# Altium PCB UZ_D_Temperature_Card_LTC2983.PcbDoc (part 2 of 2)
Units mm, origin at the board's own origin, x right, y up, seen from the top; angles counter-clockwise.
Board outline 155.99 x 100 mm, 4 copper layers (Top Layer, Layer 1, Layer 2, Bottom Layer), stack 0.98 mm thick; 288 components, 267 nets, 958 pads, 313 vias.
Unrouted connection lines stored in the file: 35.
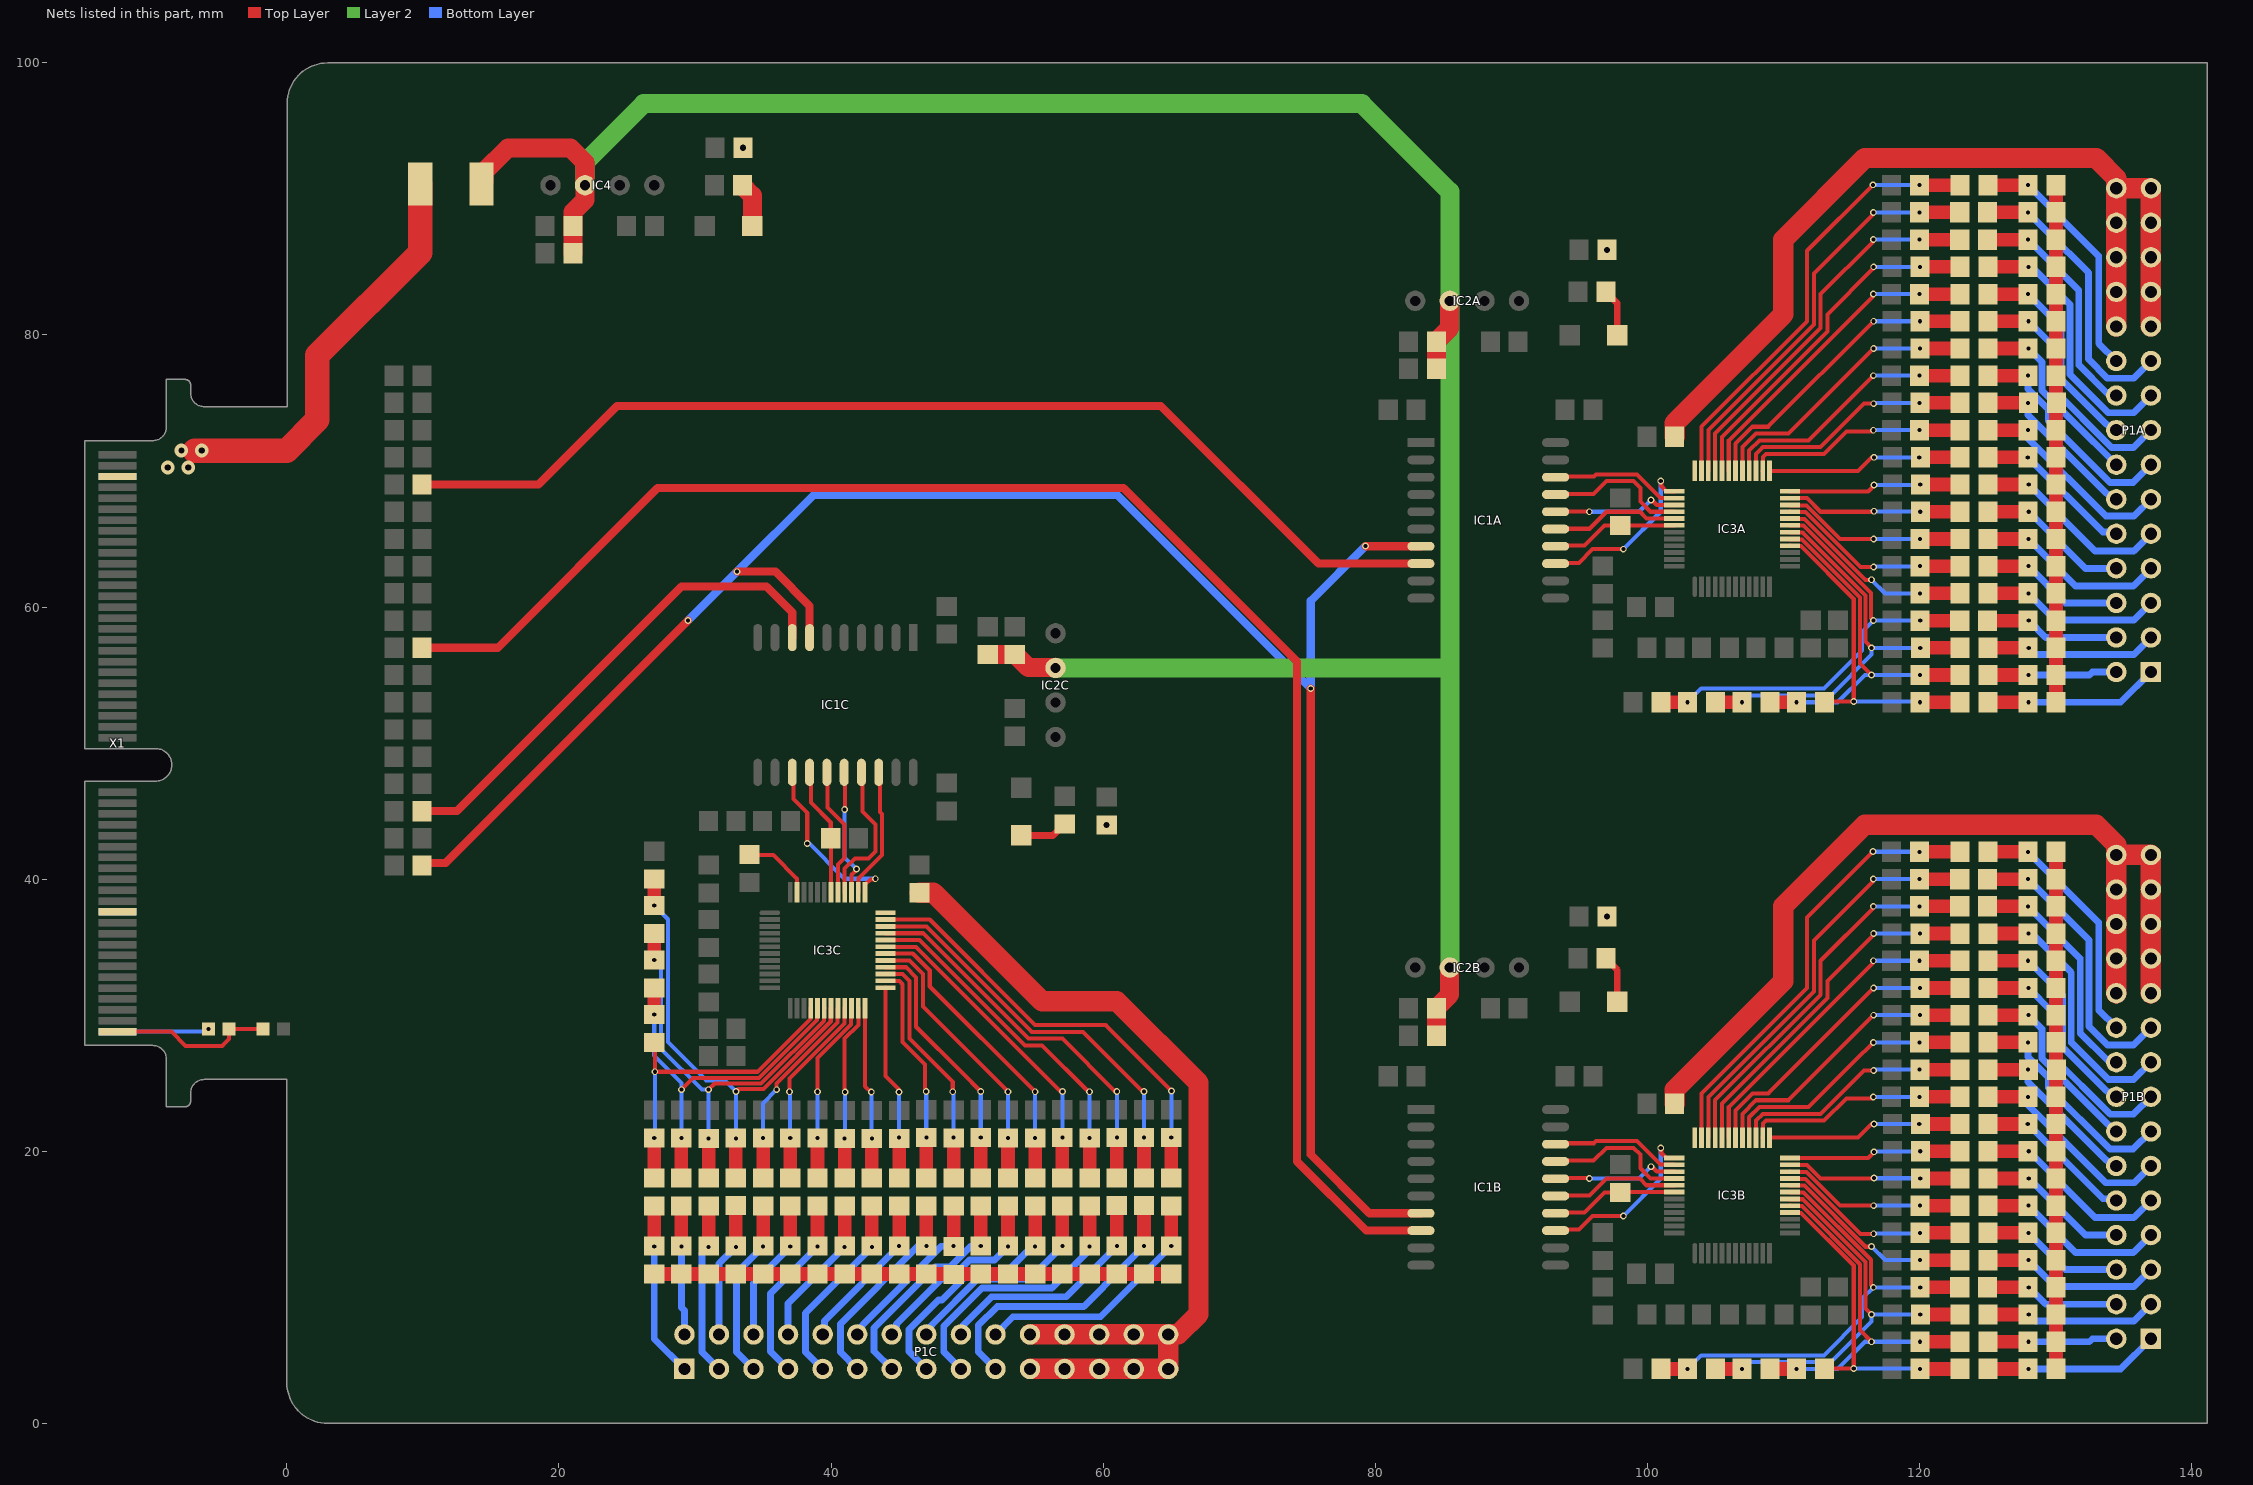
[diagram p4: the nets of this part, all layers, seen from the top]

## Via types
v1: diameter 0.5, hole 0.3, Top Layer to Bottom Layer, 229 vias
v2: diameter 1, hole 0.45, Top Layer to Bottom Layer, 84 vias

## Nets (pads, with @x,y where several pads share a name; then routed paths per layer and width w, separated by ;. In a path a pad name is that pad's centre, name@x,y a point inside that pad or via, vN(x,y) a via of type N, cw(c..) or ccw(c..) an arc to the next point about the centre after c; other vN are vias at no path point) (continued)
NetC10C_2: C10C.2 IC3C.47 | length 5.2
  Top Layer w0.3: C10C.2@34,41.8 34.025,41.775 35.75,41.775 37.5,40.025 IC3C.47@37.5,39.025
NetC14A_1: C14A.1 IC3A.16 R4A.1 R44A.1 | length 23.9
  Top Layer w0.3: IC3A.16@110.475,64.5 110.5,64.475 111.279,64.475 115.16,60.594 v1(115.16,53.044) 113.044,53.044 R44A.1@113,53
  Top Layer w1: v1(120.025,53) R4A.1@122.975,53
  Bottom Layer w0.3: v1(115.16,53.044) 119.981,53.044 v1(120.025,53)
NetC14B_1: C14B.1 IC3B.16 R4B.1 R44B.1 | length 23.9
  Top Layer w0.3: IC3B.16@110.475,15.5 110.5,15.475 111.279,15.475 115.16,11.594 v1(115.16,4.044) 113.044,4.044 R44B.1@113,4
  Top Layer w1: v1(120.025,4) R4B.1@122.975,4
  Bottom Layer w0.3: v1(115.16,4.044) 119.981,4.044 v1(120.025,4)
NetC14C_1: C14C.1 IC3C.16 R4C.1 R44C.1 | length 23.9
  Top Layer w0.3: R44C.1@27,28 27.044,27.956 v1(27.044,25.84) 34.594,25.84 38.475,29.721 38.475,30.5 IC3C.16@38.5,30.525
  Top Layer w1: R4C.1@27,18.025 v1(27,20.975)
  Bottom Layer w0.3: v1(27,20.975) 27.044,21.019 v1(27.044,25.84)
NetC15A_2: C15A.2 IC3A.35 R23A.1 | length 32.7
  Top Layer w0.3: IC3A.35@103.975,70 103.975,73.25 111.725,81 111.725,86.184 v1(116.568,91.026)
  Top Layer w1: v1(120,91) R23A.1@122.975,91
  Bottom Layer w0.3: v1(116.568,91.026) 116.581,91.013 119.987,91.013 v1(120,91)
NetC15B_2: C15B.2 IC3B.35 R23B.1 | length 32.7
  Top Layer w0.3: IC3B.35@103.975,21 103.975,24.25 111.725,32 111.725,37.184 v1(116.568,42.026)
  Top Layer w1: v1(120,42) R23B.1@122.975,42
  Bottom Layer w0.3: v1(116.568,42.026) 116.581,42.013 119.987,42.013 v1(120,42)
NetC15C_2: C15C.2 IC3C.35 R23C.1 | length 32.7
  Top Layer w0.3: IC3C.35@44,37.025 47.25,37.025 55,29.275 60.184,29.275 v1(65.026,24.432)
  Top Layer w1: R23C.1@65,18.025 v1(65,21)
  Bottom Layer w0.3: v1(65,21) 65.013,21.013 65.013,24.419 v1(65.026,24.432)
NetC16A_1: C16A.1 IC3A.17 R5A.1 R44A.2 R47A.1 | length 27.9
  Top Layer w0.3: IC3A.17@110.475,65 110.5,64.975 111.344,64.975 115.625,60.694 115.625,55.85 v1(116.475,55) ; v1(110.95,53) R44A.2@110.95,53.05
  Top Layer w1: R47A.1@109,53 v1(110.95,53) ; v1(120.025,55) R5A.1@123,55
  Bottom Layer w0.3: v1(110.95,53) 113.975,53 115.975,55 v1(120.025,55)
NetC16B_1: C16B.1 IC3B.17 R5B.1 R44B.2 R47B.1 | length 27.9
  Top Layer w0.3: IC3B.17@110.475,16 110.5,15.975 111.344,15.975 115.625,11.694 115.625,6.85 v1(116.475,6) ; v1(110.95,4) R44B.2@110.95,4.05
  Top Layer w1: R47B.1@109,4 v1(110.95,4) ; v1(120.025,6) R5B.1@123,6
  Bottom Layer w0.3: v1(110.95,4) 113.975,4 115.975,6 v1(120.025,6)
NetC16C_1: C16C.1 IC3C.17 R5C.1 R44C.2 R47C.1 | length 27.9
  Top Layer w0.3: v1(27,30.05) R44C.2@27.05,30.05 ; v1(29,24.525) 29.85,25.375 34.694,25.375 38.975,29.656 38.975,30.5 IC3C.17@39,30.525
  Top Layer w1: v1(27,30.05) R47C.1@27,32 ; R5C.1@29,18 v1(29,20.975)
  Bottom Layer w0.3: v1(27,30.05) 27,27.025 29,25.025 v1(29,20.975)
NetC17A_2: C17A.2 IC3A.34 R22A.1 | length 30.4
  Top Layer w0.3: IC3A.34@104.475,70 104.475,73 112.225,80.75 112.225,84.5 116.562,88.837 116.562,88.962 v1(116.6,89)
  Top Layer w1: v1(120,89) R22A.1@122.95,89
  Bottom Layer w0.3: v1(116.6,89) v1(120,89)
NetC17B_2: C17B.2 IC3B.34 R22B.1 | length 30.4
  Top Layer w0.3: IC3B.34@104.475,21 104.475,24 112.225,31.75 112.225,35.5 116.562,39.837 116.562,39.962 v1(116.6,40)
  Top Layer w1: v1(120,40) R22B.1@122.95,40
  Bottom Layer w0.3: v1(116.6,40) v1(120,40)
NetC17C_2: C17C.2 IC3C.34 R22C.1 | length 30.4
  Top Layer w0.3: IC3C.34@44,36.525 47,36.525 54.75,28.775 58.5,28.775 62.837,24.438 62.962,24.438 v1(63,24.4)
  Top Layer w1: R22C.1@63,18.05 v1(63,21)
  Bottom Layer w0.3: v1(63,21) v1(63,24.4)
NetC18A_1: C18A.1 IC3A.18 R6A.1 R45A.1 R47A.2 | length 31.5
  Top Layer w0.3: IC3A.18@110.475,65.5 110.5,65.475 111.41,65.475 116.025,60.86 116.025,57.45 v1(116.475,57)
  Top Layer w1: R45A.1@105,53 v1(106.95,53) ; v1(120.05,57) R6A.1@123,57
  Bottom Layer w0.3: v1(106.95,53) 107.45,53.5 111.157,53.5 113.475,53.5 116.475,56.5 v1(116.475,57) v1(120.05,57)
NetC18B_1: C18B.1 IC3B.18 R6B.1 R45B.1 R47B.2 | length 31.5
  Top Layer w0.3: IC3B.18@110.475,16.5 110.5,16.475 111.41,16.475 116.025,11.86 116.025,8.45 v1(116.475,8)
  Top Layer w1: R45B.1@105,4 v1(106.95,4) ; v1(120.05,8) R6B.1@123,8
  Bottom Layer w0.3: v1(106.95,4) 107.45,4.5 111.157,4.5 113.475,4.5 116.475,7.5 v1(116.475,8) v1(120.05,8)
NetC18C_1: C18C.1 IC3C.18 R6C.1 R45C.1 R47C.2 | length 31.5
  Top Layer w0.3: v1(31,24.525) 31.45,24.975 34.86,24.975 39.475,29.59 39.475,30.5 IC3C.18@39.5,30.525
  Top Layer w1: v1(27,34.05) R45C.1@27,36 ; R6C.1@31,18 v1(31,20.95)
  Bottom Layer w0.3: v1(27,34.05) 27.5,33.55 27.5,29.843 27.5,27.525 30.5,24.525 v1(31,24.525) v1(31,20.95)
NetC19A_2: C19A.2 IC3A.33 R21A.1 | length 28.2
  Top Layer w0.3: IC3A.33@104.975,70 104.975,72.75 112.725,80.5 112.725,83 116.562,86.837 116.562,86.962 v1(116.6,87)
  Top Layer w1: C19A.2@120.025,87 R21A.1@123,87
  Bottom Layer w0.3: v1(116.6,87) v1(120,87)
NetC19B_2: C19B.2 IC3B.33 R21B.1 | length 28.2
  Top Layer w0.3: IC3B.33@104.975,21 104.975,23.75 112.725,31.5 112.725,34 116.562,37.837 116.562,37.962 v1(116.6,38)
  Top Layer w1: C19B.2@120.025,38 R21B.1@123,38
  Bottom Layer w0.3: v1(116.6,38) v1(120,38)
NetC19C_2: C19C.2 IC3C.33 R21C.1 | length 28.2
  Top Layer w0.3: IC3C.33@44,36.025 46.75,36.025 54.5,28.275 57,28.275 60.837,24.438 60.962,24.438 v1(61,24.4)
  Top Layer w1: R21C.1@61,18 C19C.2@61,20.975
  Bottom Layer w0.3: v1(61,21) v1(61,24.4)
NetC20A_1: C20A.1 IC3A.19 R7A.1 R45A.2 R46A.1 | length 35.4
  Top Layer w0.3: IC3A.19@110.475,66 110.5,65.975 111.476,65.975 116.425,61.026 116.425,59.176 v1(116.601,59)
  Top Layer w1: R46A.1@101,53 v1(102.95,53) ; v1(120.05,59) R7A.1@123.025,59
  Bottom Layer w0.3: v1(102.95,53) 103.95,54 112.975,54 115.78,56.805 115.78,58.179 v1(116.601,59) v1(120.05,59)
NetC20B_1: C20B.1 IC3B.19 R7B.1 R45B.2 R46B.1 | length 35.4
  Top Layer w0.3: IC3B.19@110.475,17 110.5,16.975 111.476,16.975 116.425,12.026 116.425,10.176 v1(116.601,10)
  Top Layer w1: R46B.1@101,4 v1(102.95,4) ; v1(120.05,10) R7B.1@123.025,10
  Bottom Layer w0.3: v1(102.95,4) 103.95,5 112.975,5 115.78,7.805 115.78,9.179 v1(116.601,10) v1(120.05,10)
NetC20C_1: C20C.1 IC3C.19 R7C.1 R45C.2 R46C.1 | length 35.4
  Top Layer w0.3: v1(33,24.399) 33.176,24.575 35.026,24.575 39.975,29.524 39.975,30.5 IC3C.19@40,30.525
  Top Layer w1: v1(27,38.05) R46C.1@27,40 ; R7C.1@33,17.975 v1(33,20.95)
  Bottom Layer w0.3: v1(27,38.05) 28,37.05 28,28.025 30.805,25.22 32.179,25.22 v1(33,24.399) v1(33,20.95)
NetC21A_2: C21A.2 IC3A.32 R20A.1 | length 26
  Top Layer w0.3: IC3A.32@105.475,70 105.475,72.5 113.225,80.25 113.225,81.5 116.587,84.862 116.587,84.962 v1(116.625,85)
  Top Layer w1: v1(120.025,85) R20A.1@122.975,85
  Bottom Layer w0.3: v1(116.625,85) v1(120.025,85)
NetC21B_2: C21B.2 IC3B.32 R20B.1 | length 26
  Top Layer w0.3: IC3B.32@105.475,21 105.475,23.5 113.225,31.25 113.225,32.5 116.587,35.862 116.587,35.962 v1(116.625,36)
  Top Layer w1: v1(120.025,36) R20B.1@122.975,36
  Bottom Layer w0.3: v1(116.625,36) v1(120.025,36)
NetC21C_2: C21C.2 IC3C.32 R20C.1 | length 26
  Top Layer w0.3: IC3C.32@44,35.525 46.5,35.525 54.25,27.775 55.5,27.775 58.862,24.413 58.962,24.413 v1(59,24.375)
  Top Layer w1: R20C.1@59,18.025 v1(59,20.975)
  Bottom Layer w0.3: v1(59,20.975) v1(59,24.375)
NetC22A_1: C22A.1 IC3A.20 R8A.1 | length 14.9
  Top Layer w0.3: IC3A.20@110.475,66.5 110.5,66.475 111.541,66.475 116.035,61.981 v1@116.494,61.981 ; v1(116.475,62) v1@116.494,61.981 ; v1@116.513,61.962 v1@116.494,61.981
  Top Layer w1: v1(120.025,61) R8A.1@122.975,61
  Bottom Layer w0.3: v1(116.475,62) 117.475,61 v1(120.025,61)
NetC22B_1: C22B.1 IC3B.20 R8B.1 | length 14.9
  Top Layer w0.3: IC3B.20@110.475,17.5 110.5,17.475 111.541,17.475 116.035,12.981 v1@116.494,12.981 ; v1(116.475,13) v1@116.494,12.981 ; v1@116.513,12.962 v1@116.494,12.981
  Top Layer w1: v1(120.025,12) R8B.1@122.975,12
  Bottom Layer w0.3: v1(116.475,13) 117.475,12 v1(120.025,12)
NetC22C_1: C22C.1 IC3C.20 R8C.1 | length 14.9
  Top Layer w0.3: v1@35.962,24.487 v1@35.981,24.506 ; v1(36,24.525) v1@35.981,24.506 ; IC3C.20@40.5,30.525 40.475,30.5 40.475,29.459 35.981,24.965 v1@35.981,24.506
  Top Layer w1: R8C.1@35,18.025 v1(35,20.975)
  Bottom Layer w0.3: v1(35,20.975) 35,23.525 v1(36,24.525)
NetC23A_2: C23A.2 IC3A.31 R19A.1 | length 23.8
  Top Layer w0.3: IC3A.31@105.975,70 105.975,72.25 116.562,82.837 116.562,82.962 v1(116.6,83)
  Top Layer w1: C23A.2@120.025,83 R19A.1@123,83
  Bottom Layer w0.3: v1(116.6,83) v1(120,83)
NetC23B_2: C23B.2 IC3B.31 R19B.1 | length 23.8
  Top Layer w0.3: IC3B.31@105.975,21 105.975,23.25 116.562,33.837 116.562,33.962 v1(116.6,34)
  Top Layer w1: C23B.2@120.025,34 R19B.1@123,34
  Bottom Layer w0.3: v1(116.6,34) v1(120,34)
NetC23C_2: C23C.2 IC3C.31 R19C.1 | length 23.8
  Top Layer w0.3: IC3C.31@44,35.025 46.25,35.025 56.837,24.438 56.962,24.438 v1(57,24.4)
  Top Layer w1: R19C.1@57,18 C23C.2@57,20.975
  Bottom Layer w0.3: v1(57,21) v1(57,24.4)
NetC24A_1: C24A.1 IC3A.21 R9A.1 | length 14.3
  Top Layer w0.3: IC3A.21@110.475,67 110.5,66.975 111.607,66.975 115.653,62.928 116.653,62.928 116.646,62.936 v1(116.625,62.936)
  Top Layer w1: v1(120.025,63) R9A.1@123,63
  Bottom Layer w0.3: v1(116.625,62.936) 116.657,62.968 119.993,62.968 v1(120.025,63)
NetC24B_1: C24B.1 IC3B.21 R9B.1 | length 14.3
  Top Layer w0.3: IC3B.21@110.475,18 110.5,17.975 111.607,17.975 115.653,13.928 116.653,13.928 116.646,13.936 v1(116.625,13.936)
  Top Layer w1: v1(120.025,14) R9B.1@123,14
  Bottom Layer w0.3: v1(116.625,13.936) 116.657,13.968 119.993,13.968 v1(120.025,14)
NetC24C_1: C24C.1 IC3C.21 R9C.1 | length 14.3
  Top Layer w0.3: v1(36.936,24.375) 36.936,24.354 36.928,24.347 36.928,25.347 40.975,29.393 40.975,30.5 IC3C.21@41,30.525
  Top Layer w1: R9C.1@37,18 v1(37,20.975)
  Bottom Layer w0.3: v1(36.936,24.375) 36.968,24.343 36.968,21.007 v1(37,20.975)
NetC25A_2: C25A.2 IC3A.30 R18A.1 | length 22.2
  Top Layer w0.3: IC3A.30@106.475,70 106.475,72 107.725,73.25 108.875,73.25 v1(116.625,81)
  Top Layer w1: v1(120.025,81) R18A.1@122.975,81
  Bottom Layer w0.3: v1(116.625,81) v1(120.025,81)
NetC25B_2: C25B.2 IC3B.30 R18B.1 | length 22.2
  Top Layer w0.3: IC3B.30@106.475,21 106.475,23 107.725,24.25 108.875,24.25 v1(116.625,32)
  Top Layer w1: v1(120.025,32) R18B.1@122.975,32
  Bottom Layer w0.3: v1(116.625,32) v1(120.025,32)
NetC25C_2: C25C.2 IC3C.30 R18C.1 | length 22.2
  Top Layer w0.3: IC3C.30@44,34.525 46,34.525 47.25,33.275 47.25,32.125 v1(55,24.375)
  Top Layer w1: R18C.1@55,18.025 v1(55,20.975)
  Bottom Layer w0.3: v1(55,20.975) v1(55,24.375)
NetC26A_1: C26A.1 IC3A.22 R10A.1 | length 13.6
  Top Layer w0.3: IC3A.22@110.475,67.5 110.5,67.475 111.673,67.475 114.148,65 v1(116.625,65) v1@116.725,65
  Top Layer w1: v1(120.025,65) R10A.1@122.975,65
  Bottom Layer w0.3: v1(116.625,65) v1(120.025,65)
NetC26B_1: C26B.1 IC3B.22 R10B.1 | length 13.6
  Top Layer w0.3: IC3B.22@110.475,18.5 110.5,18.475 111.673,18.475 114.148,16 v1(116.625,16) v1@116.725,16
  Top Layer w1: v1(120.025,16) R10B.1@122.975,16
  Bottom Layer w0.3: v1(116.625,16) v1(120.025,16)
NetC26C_1: C26C.1 IC3C.22 R10C.1 | length 13.6
  Top Layer w0.3: v1@39,24.275 v1(39,24.375) 39,26.852 41.475,29.327 41.475,30.5 IC3C.22@41.5,30.525
  Top Layer w1: R10C.1@39,18.025 v1(39,20.975)
  Bottom Layer w0.3: v1(39,20.975) v1(39,24.375)
NetC27A_2: C27A.2 IC3A.29 R17A.1 | length 20.8
  Top Layer w0.3: IC3A.29@106.975,70 106.975,71.75 107.975,72.75 110.375,72.75 v1(116.625,79)
  Top Layer w1: C27A.2@120,79 R17A.1@122.975,79
  Bottom Layer w0.3: v1(116.625,79) v1(120.025,79)
NetC27B_2: C27B.2 IC3B.29 R17B.1 | length 20.8
  Top Layer w0.3: IC3B.29@106.975,21 106.975,22.75 107.975,23.75 110.375,23.75 v1(116.625,30)
  Top Layer w1: C27B.2@120,30 R17B.1@122.975,30
  Bottom Layer w0.3: v1(116.625,30) v1(120.025,30)
NetC27C_2: C27C.2 IC3C.29 R17C.1 | length 20.8
  Top Layer w0.3: IC3C.29@44,34.025 45.75,34.025 46.75,33.025 46.75,30.625 v1(53,24.375)
  Top Layer w1: R17C.1@53,18.025 C27C.2@53,21
  Bottom Layer w0.3: v1(53,20.975) v1(53,24.375)
NetC28A_1: C28A.1 IC3A.23 R11A.1 | length 13.1
  Top Layer w0.3: IC3A.23@110.475,68 111.725,68 112.725,67 116.725,67 116.689,67.036 v1(116.65,67.036)
  Top Layer w1: C28A.1@120.025,67 R11A.1@123,67
  Bottom Layer w0.3: v1(116.65,67.036) 116.668,67.018 120.032,67.018 v1(120.05,67)
NetC28B_1: C28B.1 IC3B.23 R11B.1 | length 13.1
  Top Layer w0.3: IC3B.23@110.475,19 111.725,19 112.725,18 116.725,18 116.689,18.036 v1(116.65,18.036)
  Top Layer w1: C28B.1@120.025,18 R11B.1@123,18
  Bottom Layer w0.3: v1(116.65,18.036) 116.668,18.018 120.032,18.018 v1(120.05,18)
NetC28C_1: C28C.1 IC3C.23 R11C.1 | length 13.1
  Top Layer w0.3: v1(41.036,24.35) 41.036,24.311 41,24.275 41,28.275 42,29.275 IC3C.23@42,30.525
  Top Layer w1: R11C.1@41,18 C28C.1@41,20.975
  Bottom Layer w0.3: v1(41,20.95) 41.018,20.968 41.018,24.332 v1(41.036,24.35)
NetC29A_2: C29A.2 IC3A.28 R16A.1 | length 19.3
  Top Layer w0.3: IC3A.28@107.475,70 107.475,71.5 108.225,72.25 111.85,72.25 115.225,75.625 v1(116.6,77)
  Top Layer w1: v1(120,77) R16A.1@122.95,77
  Bottom Layer w0.3: v1(116.6,77) v1(120,77)
NetC29B_2: C29B.2 IC3B.28 R16B.1 | length 19.3
  Top Layer w0.3: IC3B.28@107.475,21 107.475,22.5 108.225,23.25 111.85,23.25 115.225,26.625 v1(116.6,28)
  Top Layer w1: v1(120,28) R16B.1@122.95,28
  Bottom Layer w0.3: v1(116.6,28) v1(120,28)
NetC29C_2: C29C.2 IC3C.28 R16C.1 | length 19.3
  Top Layer w0.3: IC3C.28@44,33.525 45.5,33.525 46.25,32.775 46.25,29.15 49.625,25.775 v1(51,24.4)
  Top Layer w1: R16C.1@51,18.05 v1(51,21)
  Bottom Layer w0.3: v1(51,21) v1(51,24.4)
NetC30A_1: C30A.1 IC3A.24 R12A.1 | length 12.9
  Top Layer w0.3: IC3A.24@110.475,68.5 116.225,68.5 v1@116.683,68.958 ; v1(116.65,68.958) v1@116.683,68.958 ; v1@116.725,69 v1@116.683,68.958
  Top Layer w1: C30A.1@119.975,69 v1(120.05,69) R12A.1@122.925,69
  Bottom Layer w0.3: v1(116.65,68.958) 116.671,68.979 120.029,68.979 v1(120.05,69)
NetC30B_1: C30B.1 IC3B.24 R12B.1 | length 12.9
  Top Layer w0.3: IC3B.24@110.475,19.5 116.225,19.5 v1@116.683,19.958 ; v1(116.65,19.958) v1@116.683,19.958 ; v1@116.725,20 v1@116.683,19.958
  Top Layer w1: C30B.1@119.975,20 v1(120.05,20) R12B.1@122.925,20
  Bottom Layer w0.3: v1(116.65,19.958) 116.671,19.979 120.029,19.979 v1(120.05,20)
NetC30C_1: C30C.1 IC3C.24 R12C.1 | length 12.9
  Top Layer w0.3: IC3C.24@42.5,30.525 42.5,24.775 v1@42.958,24.317 ; v1(42.958,24.35) v1@42.958,24.317 ; v1@43,24.275 v1@42.958,24.317
  Top Layer w1: R12C.1@43,18.075 v1(43,20.95) C30C.1@43,21.025
  Bottom Layer w0.3: v1(42.958,24.35) 42.979,24.329 42.979,20.971 v1(43,20.95)
NetC31A_2: C31A.2 IC3A.27 R15A.1 | length 17.8
  Top Layer w0.3: IC3A.27@107.975,70 107.975,71.25 108.475,71.75 112.725,71.75 115.918,74.943 v1(116.625,74.943)
  Top Layer w1: v1(120,75) R15A.1@122.975,75
  Bottom Layer w0.3: v1(116.625,74.943) 116.682,75 v1(120,75)
NetC31B_2: C31B.2 IC3B.27 R15B.1 | length 17.8
  Top Layer w0.3: IC3B.27@107.975,21 107.975,22.25 108.475,22.75 112.725,22.75 115.918,25.943 v1(116.625,25.943)
  Top Layer w1: v1(120,26) R15B.1@122.975,26
  Bottom Layer w0.3: v1(116.625,25.943) 116.682,26 v1(120,26)
NetC31C_2: C31C.2 IC3C.27 R15C.1 | length 17.8
  Top Layer w0.3: IC3C.27@44,33.025 45.25,33.025 45.75,32.525 45.75,28.275 48.943,25.082 v1(48.943,24.375)
  Top Layer w1: R15C.1@49,18.025 v1(49,21)
  Bottom Layer w0.3: v1(48.943,24.375) 49,24.318 v1(49,21)
NetC32A_1: C32A.1 IC3A.25 R13A.1 | length 14.4
  Top Layer w0.3: IC3A.25@108.975,70 115.475,70 116.475,71 v1(116.65,71)
  Top Layer w1: v1(119.975,71) R13A.1@122.95,71
  Bottom Layer w0.3: v1(116.65,71) v1(119.975,71)
NetC32B_1: C32B.1 IC3B.25 R13B.1 | length 14.4
  Top Layer w0.3: IC3B.25@108.975,21 115.475,21 116.475,22 v1(116.65,22)
  Top Layer w1: v1(119.975,22) R13B.1@122.95,22
  Bottom Layer w0.3: v1(116.65,22) v1(119.975,22)
NetC32C_1: C32C.1 IC3C.25 R13C.1 | length 14.4
  Top Layer w0.3: IC3C.25@44,32.025 44,25.525 45,24.525 v1(45,24.35)
  Top Layer w1: R13C.1@45,18.05 v1(45,21.025)
  Bottom Layer w0.3: v1(45,21.025) v1(45,24.35)
NetC33A_2: C33A.2 IC3A.26 R14A.1 | length 16.3
  Top Layer w0.3: IC3A.26@108.475,70 108.5,70.025 108.5,71.025 108.725,71.25 112.975,71.25 114.613,72.888 116.446,72.888 116.546,72.988 v1(116.6,72.988)
  Top Layer w1: v1(120,73) R14A.1@122.95,73
  Bottom Layer w0.3: v1(116.6,72.988) 116.606,72.994 119.994,72.994 v1(120,73)
NetC33B_2: C33B.2 IC3B.26 R14B.1 | length 16.3
  Top Layer w0.3: IC3B.26@108.475,21 108.5,21.025 108.5,22.025 108.725,22.25 112.975,22.25 114.613,23.888 116.446,23.888 116.546,23.988 v1(116.6,23.988)
  Top Layer w1: v1(120,24) R14B.1@122.95,24
  Bottom Layer w0.3: v1(116.6,23.988) 116.606,23.994 119.994,23.994 v1(120,24)
NetC33C_2: C33C.2 IC3C.26 R14C.1 | length 16.3
  Top Layer w0.3: IC3C.26@44,32.525 44.025,32.5 45.025,32.5 45.25,32.275 45.25,28.025 46.888,26.387 46.888,24.554 46.988,24.454 v1(46.988,24.4)
  Top Layer w1: R14C.1@47,18.05 v1(47,21)
  Bottom Layer w0.3: v1(46.988,24.4) 46.994,24.394 46.994,21.006 v1(47,21)
NetD1A_1: D1A.1 R1A.2 | length 3.5
  Top Layer w0.5: R1A.2@96.96,83.18 96.96,83.13 97.785,82.305 D1A.1@97.785,79.978
NetD1B_1: D1B.1 R1B.2 | length 3.5
  Top Layer w0.5: R1B.2@96.96,34.18 96.96,34.13 97.785,33.305 D1B.1@97.785,30.978
NetD1C_1: D1C.1 R1C.2 | length 3.5
  Top Layer w0.5: D1C.1@53.978,43.215 56.305,43.215 57.13,44.04 R1C.2@57.18,44.04
NetD2_1: D2.1 R49.2 | length 3.3
  Top Layer w1.4: R49.2@33.485,91 33.485,90.95 34.21,90.225 D2.1@34.21,88
NetIC1A_13: IC1A.13 IC3A.37 | length 12.8
  Top Layer w0.3: IC1A.13@93.44,63.24 94.965,63.24 95.975,64.25 v1(98.225,64.25) ; v1(100.975,69.25) 101.013,69.212 101.013,68.887 101.4,68.5 IC3A.37@101.975,68.5
  Bottom Layer w0.3: v1(98.225,64.25) 100.975,67 v1(100.975,69.25)
NetIC1A_14: IC1A.14 IC3A.42 R2A.1 | length 9.2
  Top Layer w0.3: IC1A.14@93.44,64.51 95.374,64.51 96.839,65.975 R2A.1@98,65.975 98.025,66 IC3A.42@101.975,66
NetIC1A_15: IC1A.15 IC3A.41 | length 9.3
  Top Layer w0.3: IC1A.15@93.44,65.78 93.47,65.75 95.725,65.75 96.975,67 99.438,67 99.937,66.5 IC3A.41@101.975,66.5
NetIC1A_16: IC1A.16 IC3A.39 | length 9.1
  Top Layer w0.3: IC1A.16@93.44,67.05 93.465,67.025 95.7,67.025 v1(95.725,67) ; v1(100.26,67.866) 100.314,67.866 100.681,67.5 IC3A.39@101.975,67.5
  Bottom Layer w0.3: v1(95.725,67) 99.394,67 v1(100.26,67.866)
NetIC1A_17: IC1A.17 IC3A.40 | length 10.4
  Top Layer w0.3: IC1A.17@93.44,68.32 96.045,68.32 96.975,69.25 98.975,69.25 99.475,68.75 99.475,67.75 100.225,67 IC3A.40@101.975,67
NetIC1A_18: IC1A.18 IC3A.38 | length 9.3
  Top Layer w0.3: IC1A.18@93.44,69.59 96.065,69.59 96.225,69.75 99.225,69.75 100.95,68.025 101.95,68.025 IC3A.38@101.975,68
NetIC1B_13: IC1B.13 IC3B.37 | length 12.8
  Top Layer w0.3: IC1B.13@93.44,14.24 94.965,14.24 95.975,15.25 v1(98.225,15.25) ; v1(100.975,20.25) 101.013,20.212 101.013,19.887 101.4,19.5 IC3B.37@101.975,19.5
  Bottom Layer w0.3: v1(98.225,15.25) 100.975,18 v1(100.975,20.25)
NetIC1B_14: IC1B.14 IC3B.42 R2B.1 | length 9.2
  Top Layer w0.3: IC1B.14@93.44,15.51 95.374,15.51 96.839,16.975 R2B.1@98,16.975 98.025,17 IC3B.42@101.975,17
NetIC1B_15: IC1B.15 IC3B.41 | length 9.3
  Top Layer w0.3: IC1B.15@93.44,16.78 93.47,16.75 95.725,16.75 96.975,18 99.438,18 99.937,17.5 IC3B.41@101.975,17.5
NetIC1B_16: IC1B.16 IC3B.39 | length 9.1
  Top Layer w0.3: IC1B.16@93.44,18.05 93.465,18.025 95.7,18.025 v1(95.725,18) ; v1(100.26,18.866) 100.314,18.866 100.681,18.5 IC3B.39@101.975,18.5
  Bottom Layer w0.3: v1(95.725,18) 99.394,18 v1(100.26,18.866)
NetIC1B_17: IC1B.17 IC3B.40 | length 10.4
  Top Layer w0.3: IC1B.17@93.44,19.32 96.045,19.32 96.975,20.25 98.975,20.25 99.475,19.75 99.475,18.75 100.225,18 IC3B.40@101.975,18
NetIC1B_18: IC1B.18 IC3B.38 | length 9.3
  Top Layer w0.3: IC1B.18@93.44,20.59 96.065,20.59 96.225,20.75 99.225,20.75 100.95,19.025 101.95,19.025 IC3B.38@101.975,19
NetIC1C_13: IC1C.13 IC3C.37 | length 12.8
  Top Layer w0.3: IC1C.13@37.24,47.41 37.24,45.885 38.25,44.875 v1(38.25,42.625) ; IC3C.37@42.5,39.025 42.5,39.6 42.887,39.987 43.212,39.987 v1(43.25,40.025)
  Bottom Layer w0.3: v1@38.25,42.775 41,40.025 v1(43.25,40.025)
NetIC1C_14: IC1C.14 IC3C.42 R2C.1 | length 9.2
  Top Layer w0.3: IC1C.14@38.51,47.56 38.51,45.626 39.975,44.161 R2C.1@39.975,43 40,42.975 IC3C.42@40,39.025
NetIC1C_15: IC1C.15 IC3C.41 | length 9.3
  Top Layer w0.3: IC1C.15@39.78,47.56 39.75,47.53 39.75,45.275 41,44.025 41,41.563 40.5,41.063 IC3C.41@40.5,39.025
NetIC1C_16: IC1C.16 IC3C.39 | length 9.1
  Top Layer w0.3: v1(41,45.125) 41.025,45.15 41.025,47.385 IC1C.16@41.05,47.41 ; IC3C.39@41.5,39.025 41.5,40.319 41.866,40.686 v1(41.866,40.74)
  Bottom Layer w0.3: v1@41,45.275 41,41.606 v1(41.866,40.74)
NetIC1C_17: IC1C.17 IC3C.40 | length 10.4
  Top Layer w0.3: IC3C.40@41,39.025 41,40.775 41.75,41.525 42.75,41.525 43.25,42.025 43.25,44.025 42.32,44.955 IC1C.17@42.32,47.56
NetIC1C_18: IC1C.18 IC3C.38 | length 9.3
  Top Layer w0.3: IC3C.38@42,39.025 42.025,39.05 42.025,40.05 43.75,41.775 43.75,44.775 43.59,44.935 IC1C.18@43.59,47.56
NetIC3A_36: IC3A.36 P1A.21 P1A.22 P1A.23 P1A.24 P1A.25 P1A.26 P1A.27 P1A.28 P1A.29 P1A.30 R3A.1 | length 69
  Top Layer w1.5: R3A.1@102,72.5 102,73.525 109.975,81.5 109.975,87 115.975,93 132.975,93 134.46,91.515 P1A.30@134.46,90.78 ; P1A.22@134.46,80.62 P1A.24@134.46,83.16 P1A.26@134.46,85.7 P1A.28@134.46,88.24 P1A.30@134.46,90.78 ; P1A.21@137,80.62 P1A.23@137,83.16 P1A.25@137,85.7 P1A.27@137,88.24 P1A.29@137,90.78 P1A.30@134.46,90.78
NetIC3B_36: IC3B.36 P1B.21 P1B.22 P1B.23 P1B.24 P1B.25 P1B.26 P1B.27 P1B.28 P1B.29 P1B.30 R3B.1 | length 69
  Top Layer w1.5: R3B.1@102,23.5 102,24.525 109.975,32.5 109.975,38 115.975,44 132.975,44 134.46,42.515 P1B.30@134.46,41.78 ; P1B.22@134.46,31.62 P1B.24@134.46,34.16 P1B.26@134.46,36.7 P1B.28@134.46,39.24 P1B.30@134.46,41.78 ; P1B.21@137,31.62 P1B.23@137,34.16 P1B.25@137,36.7 P1B.27@137,39.24 P1B.29@137,41.78 P1B.30@134.46,41.78
NetIC3C_36: IC3C.36 P1C.21 P1C.22 P1C.23 P1C.24 P1C.25 P1C.26 P1C.27 P1C.28 P1C.29 P1C.30 R3C.1 | length 69
  Top Layer w1.5: R3C.1@46.5,39 47.525,39 55.5,31.025 61,31.025 67,25.025 67,8.025 65.515,6.54 P1C.30@64.78,6.54 ; P1C.21@54.62,4 P1C.23@57.16,4 P1C.25@59.7,4 P1C.27@62.24,4 P1C.29@64.78,4 P1C.30@64.78,6.54 ; P1C.22@54.62,6.54 P1C.24@57.16,6.54 P1C.26@59.7,6.54 P1C.28@62.24,6.54 P1C.30@64.78,6.54
NetP1A_1: P1A.1 R4A.2 R24A.1 | length 12.9
  Top Layer w1: R4A.2@125.025,53 v1(128,53)
  Bottom Layer w0.5: v1(128,53) 134.78,53 P1A.1@137,55.22
NetP1A_2: P1A.2 R5A.2 R25A.1 | length 9.5
  Top Layer w1: R5A.2@125.05,55 v1(128,55)
  Bottom Layer w0.5: v1(128,55) 132.475,55 132.695,55.22 P1A.2@134.46,55.22
NetP1A_3: P1A.3 R6A.2 R26A.1 | length 12.7
  Top Layer w1: R6A.2@125.05,57 v1(128.025,57)
  Bottom Layer w0.5: v1(128.025,57) 128.509,56.516 135.756,56.516 P1A.3@137,57.76
NetP1A_4: P1A.4 R7A.2 R27A.1 | length 9.9
  Top Layer w1: R7A.2@125.075,59 v1(128.025,59)
  Bottom Layer w0.5: v1(128.025,59) 129.265,57.76 P1A.4@134.46,57.76
NetP1A_5: P1A.5 R8A.2 R28A.1 | length 13.3
  Top Layer w1: R8A.2@125.025,61 v1(128,61)
  Bottom Layer w0.5: v1(128,61) 129.951,59.049 135.749,59.049 P1A.5@137,60.3
NetP1A_6: P1A.6 R9A.2 R29A.1 | length 10.5
  Top Layer w1: R9A.2@125.05,63 v1(128,63)
  Bottom Layer w0.5: v1(128,63) 130.7,60.3 P1A.6@134.46,60.3
NetP1A_7: P1A.7 R10A.2 R30A.1 | length 13.9
  Top Layer w1: R10A.2@125.025,65 v1(128,65)
  Bottom Layer w0.5: v1(128,65) 131.452,61.548 135.708,61.548 P1A.7@137,62.84
NetP1A_8: P1A.8 R11A.2 R31A.1 | length 11.1
  Top Layer w1: R11A.2@125.05,67 R31A.1@128,67
  Bottom Layer w0.5: v1(128.025,67) 132.185,62.84 P1A.8@134.46,62.84
NetP1A_9: P1A.9 R12A.2 R32A.1 | length 14.5
  Top Layer w1: R12A.2@124.975,69 R32A.1@127.95,69
  Bottom Layer w0.5: v1(128.025,69) 132.899,64.126 135.746,64.126 P1A.9@137,65.38
NetP1A_10: P1A.10 R13A.2 R33A.1 | length 11.8
  Top Layer w1: R13A.2@125,71 v1(127.95,71)
  Bottom Layer w0.5: v1(127.95,71) 127.975,71 133.467,65.508 134.332,65.508 P1A.10@134.46,65.38
NetP1A_11: P1A.11 R14A.2 R34A.1 | length 15.5
  Top Layer w1: R14A.2@125,73 v1(127.975,73)
  Bottom Layer w0.5: v1(127.975,73) 127.975,72.392 133.686,66.681 135.761,66.681 P1A.11@137,67.92
NetP1A_12: P1A.12 R15A.2 R35A.1 | length 12.9
  Top Layer w1: R15A.2@125.025,75 v1(127.975,75)
  Bottom Layer w0.5: v1(127.975,75) 127.975,74.103 133.748,68.33 133.78,68.33 134.189,67.92 P1A.12@134.46,67.92
NetP1A_13: P1A.13 R16A.2 R36A.1 | length 16.9
  Top Layer w1: R16A.2@125,77 v1(127.975,77)
  Bottom Layer w0.5: v1(127.975,77) 127.975,76.025 129.482,74.518 129.482,73.668 133.992,69.158 135.698,69.158 P1A.13@137,70.46
NetP1A_14: P1A.14 R17A.2 R37A.1 | length 14.2
  Top Layer w1: R17A.2@125.025,79 R37A.1@127.975,79
  Bottom Layer w0.5: v1(128,79) 129,78 129,75.919 131.279,73.64 131.279,73.636 134.454,70.46 P1A.14@134.46,70.46
NetP1A_15: P1A.15 R18A.2 R38A.1 | length 18.2
  Top Layer w1: R18A.2@125.025,81 v1(128,81)
  Bottom Layer w0.5: v1(128,81) 129.75,79.25 129.75,76.088 131.929,73.91 131.929,73.905 134.108,71.726 135.726,71.726 P1A.15@137,73
NetP1A_16: P1A.16 R19A.2 R39A.1 | length 15.8
  Top Layer w1: R19A.2@125.05,83 R39A.1@128,83
  Bottom Layer w0.5: v1(127.975,83) 130.4,80.575 130.4,76.767 133.753,73.414 133.775,73.414 134.189,73 P1A.16@134.46,73
NetP1A_17: P1A.17 R20A.2 R40A.1 | length 19.9
  Top Layer w1: R20A.2@125.025,85 v1(128,85)
  Bottom Layer w0.5: v1(128,85) 128.272,85 131.05,82.222 131.05,77.09 133.867,74.273 135.733,74.273 P1A.17@137,75.54
NetP1A_18: P1A.18 R21A.2 R41A.1 | length 17.4
  Top Layer w1: R21A.2@125.05,87 R41A.1@128,87
  Bottom Layer w0.5: v1(127.975,87) 131.7,83.275 131.7,77.786 133.755,75.731 134.269,75.731 P1A.18@134.46,75.54
NetP1A_19: P1A.19 R22A.2 R42A.1 | length 21.3
  Top Layer w1: R22A.2@125,89 v1(127.975,89)
  Bottom Layer w0.5: v1(127.975,89) 129.475,87.5 132.404,84.571 132.404,78.217 133.81,76.811 135.731,76.811 P1A.19@137,78.08
NetP1A_20: P1A.20 R23A.2 R43A.1 | length 18.6
  Top Layer w1: R23A.2@125.025,91 v1(127.975,91)
  Bottom Layer w0.5: v1(127.975,91) 133.162,85.813 133.162,79.378 P1A.20@134.46,78.08
NetP1B_1: P1B.1 R4B.2 R24B.1 | length 12.9
  Top Layer w1: R4B.2@125.025,4 v1(128,4)
  Bottom Layer w0.5: v1(128,4) 134.78,4 P1B.1@137,6.22
NetP1B_2: P1B.2 R5B.2 R25B.1 | length 9.5
  Top Layer w1: R5B.2@125.05,6 v1(128,6)
  Bottom Layer w0.5: v1(128,6) 132.475,6 132.695,6.22 P1B.2@134.46,6.22
NetP1B_3: P1B.3 R6B.2 R26B.1 | length 12.7
  Top Layer w1: R6B.2@125.05,8 v1(128.025,8)
  Bottom Layer w0.5: v1(128.025,8) 128.509,7.516 135.756,7.516 P1B.3@137,8.76
NetP1B_4: P1B.4 R7B.2 R27B.1 | length 9.9
  Top Layer w1: R7B.2@125.075,10 v1(128.025,10)
  Bottom Layer w0.5: v1(128.025,10) 129.265,8.76 P1B.4@134.46,8.76
NetP1B_5: P1B.5 R8B.2 R28B.1 | length 13.3
  Top Layer w1: R8B.2@125.025,12 v1(128,12)
  Bottom Layer w0.5: v1(128,12) 129.951,10.049 135.749,10.049 P1B.5@137,11.3
NetP1B_6: P1B.6 R9B.2 R29B.1 | length 10.5
  Top Layer w1: R9B.2@125.05,14 v1(128,14)
  Bottom Layer w0.5: v1(128,14) 130.7,11.3 P1B.6@134.46,11.3
NetP1B_7: P1B.7 R10B.2 R30B.1 | length 13.9
  Top Layer w1: R10B.2@125.025,16 v1(128,16)
  Bottom Layer w0.5: v1(128,16) 131.452,12.548 135.708,12.548 P1B.7@137,13.84
NetP1B_8: P1B.8 R11B.2 R31B.1 | length 11.1
  Top Layer w1: R11B.2@125.05,18 R31B.1@128,18
  Bottom Layer w0.5: v1(128.025,18) 132.185,13.84 P1B.8@134.46,13.84
NetP1B_9: P1B.9 R12B.2 R32B.1 | length 14.5
  Top Layer w1: R12B.2@124.975,20 R32B.1@127.95,20
  Bottom Layer w0.5: v1(128.025,20) 132.899,15.126 135.746,15.126 P1B.9@137,16.38
NetP1B_10: P1B.10 R13B.2 R33B.1 | length 11.8
  Top Layer w1: R13B.2@125,22 v1(127.95,22)
  Bottom Layer w0.5: v1(127.95,22) 127.975,22 133.467,16.508 134.332,16.508 P1B.10@134.46,16.38
NetP1B_11: P1B.11 R14B.2 R34B.1 | length 15.5
  Top Layer w1: R14B.2@125,24 v1(127.975,24)
  Bottom Layer w0.5: v1(127.975,24) 127.975,23.392 133.686,17.681 135.761,17.681 P1B.11@137,18.92
NetP1B_12: P1B.12 R15B.2 R35B.1 | length 12.9
  Top Layer w1: R15B.2@125.025,26 v1(127.975,26)
  Bottom Layer w0.5: v1(127.975,26) 127.975,25.103 133.748,19.33 133.78,19.33 134.189,18.92 P1B.12@134.46,18.92
NetP1B_13: P1B.13 R16B.2 R36B.1 | length 16.9
  Top Layer w1: R16B.2@125,28 v1(127.975,28)
  Bottom Layer w0.5: v1(127.975,28) 127.975,26.919 129.482,25.412 129.482,24.668 133.992,20.158 135.698,20.158 P1B.13@137,21.46
NetP1B_14: P1B.14 R17B.2 R37B.1 | length 14.2
  Top Layer w1: R17B.2@125.025,30 R37B.1@127.975,30
  Bottom Layer w0.5: v1(128,30) 129,29 129,26.814 134.353,21.46 P1B.14@134.46,21.46
NetP1B_15: P1B.15 R18B.2 R38B.1 | length 18.3
  Top Layer w1: R18B.2@125.025,32 v1(128,32)
  Bottom Layer w0.5: v1(128,32) 129.75,30.25 129.75,26.983 134.007,22.726 135.726,22.726 P1B.15@137,24
NetP1B_16: P1B.16 R19B.2 R39B.1 | length 15.8
  Top Layer w1: R19B.2@125.05,34 R39B.1@128,34
  Bottom Layer w0.5: v1(127.975,34) 130.5,31.475 130.5,27.667 133.753,24.414 133.775,24.414 134.189,24 P1B.16@134.46,24
NetP1B_17: P1B.17 R20B.2 R40B.1 | length 19.9
  Top Layer w1: R20B.2@125.025,36 v1(128,36)
  Bottom Layer w0.5: v1(128,36) 128.272,36 131.15,33.122 131.15,27.99 133.867,25.273 135.733,25.273 P1B.17@137,26.54
NetP1B_18: P1B.18 R21B.2 R41B.1 | length 17.4
  Top Layer w1: R21B.2@125.05,38 R41B.1@128,38
  Bottom Layer w0.5: v1(127.975,38) 131.8,34.175 131.8,28.686 133.755,26.731 134.269,26.731 P1B.18@134.46,26.54
NetP1B_19: P1B.19 R22B.2 R42B.1 | length 21.3
  Top Layer w1: R22B.2@125,40 v1(127.975,40)
  Bottom Layer w0.5: v1(127.975,40) 129.475,38.5 132.45,35.525 132.45,29.171 133.81,27.811 135.731,27.811 P1B.19@137,29.08
NetP1B_20: P1B.20 R23B.2 R43B.1 | length 18.6
  Top Layer w1: R23B.2@125.025,42 v1(127.975,42)
  Bottom Layer w0.5: v1(127.975,42) 133.162,36.813 133.162,30.378 P1B.20@134.46,29.08
NetP1C_1: P1C.1 R4C.2 R24C.1 | length 12.9
  Top Layer w1: v1(27,13) R4C.2@27,15.975
  Bottom Layer w0.5: v1(27,13) 27,6.22 P1C.1@29.22,4
NetP1C_2: P1C.2 R5C.2 R25C.1 | length 9.5
  Top Layer w1: R25C.1@29,13 R5C.2@29,15.95
  Bottom Layer w0.5: v1(29,13) 29,8.525 29.22,8.305 P1C.2@29.22,6.54
NetP1C_3: P1C.3 R6C.2 R26C.1 | length 12.7
  Top Layer w1: v1(31,12.975) R6C.2@31,15.95
  Bottom Layer w0.5: v1(31,12.975) 30.516,12.491 30.516,5.244 P1C.3@31.76,4
NetP1C_4: P1C.4 R7C.2 R27C.1 | length 9.9
  Top Layer w1: v1(33,12.975) R7C.2@33,15.925
  Bottom Layer w0.5: P1C.4@31.76,6.54 31.76,11.735 v1(33,12.975)
NetP1C_5: P1C.5 R8C.2 R28C.1 | length 13.3
  Top Layer w1: v1(35,13) R8C.2@35,15.975
  Bottom Layer w0.5: P1C.5@34.3,4 33.049,5.251 33.049,11.049 v1(35,13)
NetP1C_6: P1C.6 R9C.2 R29C.1 | length 10.5
  Top Layer w1: v1(37,13) R9C.2@37,15.95
  Bottom Layer w0.5: P1C.6@34.3,6.54 34.3,10.3 v1(37,13)
NetP1C_7: P1C.7 R10C.2 R30C.1 | length 13.9
  Top Layer w1: v1(39,13) R10C.2@39,15.975
  Bottom Layer w0.5: P1C.7@36.84,4 35.548,5.292 35.548,9.548 v1(39,13)
NetP1C_8: P1C.8 R11C.2 R31C.1 | length 11.1
  Top Layer w1: R31C.1@41,13 R11C.2@41,15.95
  Bottom Layer w0.5: P1C.8@36.84,6.54 36.84,8.815 v1(41,12.975)
NetP1C_9: P1C.9 R12C.2 R32C.1 | length 14.5
  Top Layer w1: R32C.1@43,13.05 R12C.2@43,16.025
  Bottom Layer w0.5: P1C.9@39.38,4 38.126,5.254 38.126,8.101 v1(43,12.975)
NetP1C_10: P1C.10 R13C.2 R33C.1 | length 11.8
  Top Layer w1: v1(45,13.05) R13C.2@45,16
  Bottom Layer w0.5: P1C.10@39.38,6.54 39.508,6.668 39.508,7.533 45,13.025 v1(45,13.05)
NetP1C_11: P1C.11 R14C.2 R34C.1 | length 15.5
  Top Layer w1: v1(47,13.025) R14C.2@47,16
  Bottom Layer w0.5: P1C.11@41.92,4 40.681,5.239 40.681,7.314 46.392,13.025 v1(47,13.025)
NetP1C_12: P1C.12 R15C.2 R35C.1 | length 12.9
  Top Layer w1: v1(49,13.025) R15C.2@49,15.975
  Bottom Layer w0.5: P1C.12@41.92,6.54 41.92,6.811 42.33,7.22 42.33,7.252 48.103,13.025 v1(49,13.025)
NetP1C_13: P1C.13 R16C.2 R36C.1 | length 16.9
  Top Layer w1: v1(51,13.025) R16C.2@51,16
  Bottom Layer w0.5: P1C.13@44.46,4 43.158,5.302 43.158,7.008 47.668,11.518 48.768,11.518 50.275,13.025 v1(51,13.025)
NetP1C_14: P1C.14 R17C.2 R37C.1 | length 14.4
  Top Layer w1: R37C.1@53,13.025 R17C.2@53,15.975
  Bottom Layer w0.5: P1C.14@44.46,6.54 44.46,6.811 44.808,7.159 44.808,7.313 48.363,10.868 49.037,10.868 50.169,12 52,12 v1(53,13)
NetP1C_15: P1C.15 R18C.2 R38C.1 | length 18.2
  Top Layer w1: v1(55,13) R18C.2@55,15.975
  Bottom Layer w0.5: P1C.15@47,4 45.726,5.274 45.726,6.892 47.905,9.071 48.16,9.071 50.338,11.25 53,11.25 54.75,13 v1(55,13)
NetP1C_16: P1C.16 R19C.2 R39C.1 | length 15.8
  Top Layer w1: R39C.1@57,13 R19C.2@57,15.95
  Bottom Layer w0.5: P1C.16@47,6.54 47,6.811 47.414,7.225 47.414,7.247 50.767,10.6 54.575,10.6 v1(57,13.025)
NetP1C_17: P1C.17 R20C.2 R40C.1 | length 19.9
  Top Layer w1: v1(59,13) R20C.2@59,15.975
  Bottom Layer w0.5: P1C.17@49.54,4 48.273,5.267 48.273,7.133 51.09,9.95 56.222,9.95 59,12.728 v1(59,13)
NetP1C_18: P1C.18 R21C.2 R41C.1 | length 17.4
  Top Layer w1: R41C.1@61,13 R21C.2@61,15.95
  Bottom Layer w0.5: P1C.18@49.54,6.54 49.731,6.731 49.731,7.245 51.786,9.3 57.275,9.3 v1(61,13.025)
NetP1C_19: P1C.19 R22C.2 R42C.1 | length 21.3
  Top Layer w1: v1(63,13.025) R22C.2@63,16
  Bottom Layer w0.5: P1C.19@52.08,4 50.811,5.269 50.811,7.19 52.217,8.596 58.571,8.596 61.5,11.525 v1(63,13.025)
NetP1C_20: P1C.20 R23C.2 R43C.1 | length 18.6
  Top Layer w1: v1(65,13.025) R23C.2@65,15.975
  Bottom Layer w0.5: P1C.20@52.08,6.54 53.378,7.838 59.813,7.838 v1(65,13.025)
NetR24A_2: R24A.2 R25A.2 R26A.2 R27A.2 R28A.2 R29A.2 R30A.2 R31A.2 R32A.2 R33A.2 R34A.2 R35A.2 R36A.2 R37A.2 R38A.2 R39A.2 R40A.2 R41A.2 R42A.2 R43A.2 | length 38
  Top Layer w1: R24A.2@130.025,53 R25A.2@130.025,55 R26A.2@130.025,57 R27A.2@130.025,59 R28A.2@130.025,61 R29A.2@130.025,63 R30A.2@130.025,65 R31A.2@130.025,67 R32A.2@130.025,69 R33A.2@130.025,71 R34A.2@130.025,73 R36A.2@130.025,77 R37A.2@130.025,79 R38A.2@130.025,81 R39A.2@130.025,83 R40A.2@130.025,85 R41A.2@130.025,87 R42A.2@130.025,89 R43A.2@130.025,91
NetR24B_2: R24B.2 R25B.2 R26B.2 R27B.2 R28B.2 R29B.2 R30B.2 R31B.2 R32B.2 R33B.2 R34B.2 R35B.2 R36B.2 R37B.2 R38B.2 R39B.2 R40B.2 R41B.2 R42B.2 R43B.2 | length 38
  Top Layer w1: R24B.2@130.025,4 R25B.2@130.025,6 R26B.2@130.025,8 R27B.2@130.025,10 R28B.2@130.025,12 R29B.2@130.025,14 R30B.2@130.025,16 R31B.2@130.025,18 R32B.2@130.025,20 R33B.2@130.025,22 R34B.2@130.025,24 R36B.2@130.025,28 R37B.2@130.025,30 R38B.2@130.025,32 R39B.2@130.025,34 R40B.2@130.025,36 R41B.2@130.025,38 R42B.2@130.025,40 R43B.2@130.025,42
NetR24C_2: R24C.2 R25C.2 R26C.2 R27C.2 R28C.2 R29C.2 R30C.2 R31C.2 R32C.2 R33C.2 R34C.2 R35C.2 R36C.2 R37C.2 R38C.2 R39C.2 R40C.2 R41C.2 R42C.2 R43C.2 | length 38
  Top Layer w1: R24C.2@27,10.975 R25C.2@29,10.975 R26C.2@31,10.975 R27C.2@33,10.975 R28C.2@35,10.975 R29C.2@37,10.975 R30C.2@39,10.975 R31C.2@41,10.975 R32C.2@43,10.975 R33C.2@45,10.975 R34C.2@47,10.975 R36C.2@51,10.975 R37C.2@53,10.975 R38C.2@55,10.975 R39C.2@57,10.975 R40C.2@59,10.975 R41C.2@61,10.975 R42C.2@63,10.975 R43C.2@65,10.975
NetR50_2: 
NetR51_2: 
NetR52_2: 
NetR53_2: 
NetR54_2: 
NetR55_2: 
NetR56_2: 
NetR57_2: 
NetR58_2: 
NetR59_2: 
NetR60_2: 
NetR61_2: 
NetR62_2: 
NetR63_2: 
NetR64_2: 
NetR65_2: 
NetR66_2: 
NetR67_2: 
PILOT_IN: R48.2 X1.100 | length 6.8
  Bottom Layer w0.3: X1.100@-12.44,28.791 -6.013,28.791 -5.804,29 v1(-5.75,29)
PILOT_OUT: R47.2 R48.1 X1.99 | length 12.1
  Top Layer w0.3: X1.99@-12.44,28.791 -8.491,28.791 -7.45,27.75 -4.75,27.75 -4.25,28.25 R48.1@-4.25,29 R47.2@-1.75,29
PS_DIG_GPIO_01: X1.77
PS_DIG_GPIO_02: X1.78
Shield_LTCA: R70A.2
  other v2: 97.025,86.25
Shield_LTCB: R70B.2
  other v2: 97.025,37.25
Shield_LTCC: R70C.2
  other v2: 60.25,43.975
Shield_Main: R69.2
  other v2: 33.525,93.75
VCC_Fused: C3A.1 C3B.1 C3C.1 C6A.1 C6B.1 C6C.1 C34.1 C35.1 F1.2 IC2A.2 IC2B.2 IC2C.2 IC4.2 | length 188.5
  Top Layer w1.4: F1.2@14.3,91.1 14.49,91.29 14.49,91.975 16.265,93.75 20.831,93.75 21.901,92.68 21.901,89.901 21.025,89.025 C34.1@21.025,88 C35.1@21.025,86 ; C3C.1@51.5,56.5 53.55,56.5 54.506,55.544 56.481,55.544 IC2C.2@56.5,55.525 ; C3B.1@84.5,28.5 C6B.1@84.5,30.5 84.5,30.55 85.456,31.506 85.456,33.481 IC2B.2@85.475,33.5 ; C3A.1@84.5,77.5 C6A.1@84.5,79.5 84.5,79.55 85.456,80.506 85.456,82.481 IC2A.2@85.475,82.5
  Layer 2 w1.4: IC4.2@21.92,91 21.92,92.699 26.221,97 79,97 85.475,90.525 IC2A.2@85.475,82.5 ; IC2C.2@56.5,55.525 56.508,55.533 85.441,55.533 ; IC2B.2@85.475,33.5 IC2A.2@85.475,82.5
VIA: IC1A.7 IC1B.7 IC1C.7 R68.2 | length 151.6
  Top Layer w0.6: R68.2@9.942,41 10.133,41.191 11.673,41.191 v1(29.482,59) ; v1(33.08,62.597) 35.903,62.597 38.42,60.08 IC1C.7@38.42,57.75 ; v1(75.25,54) 75.25,19.75 79.56,15.44 IC1B.7@83.35,15.44 ; v1(79.275,64.479) 79.294,64.46 IC1A.7@83.35,64.46
  Bottom Layer w0.6: v1(29.482,59) v1(33.08,62.597) 38.732,68.25 61,68.25 v1(75.25,54) 75.25,60.455 v1(79.275,64.479)
VIN: F1.1 X1.5 X1.6 | length 30.4
  Top Layer w1.8: -6.773,71.5 0,71.5 2.25,73.75 2.25,78.5 9.8,86.05 F1.1@9.8,91.1
  other v2: -8.75,70.25 -7.25,70.25 -7.75,71.5 -6.25,71.5
VOB_BUS1: IC1A.8 R54.2 | length 80.6
  Top Layer w0.6: R54.2@9.942,69 18.5,69 24.273,74.773 64.227,74.773 75.81,63.19 IC1A.8@83.35,63.19
VOB_BUS2: IC1B.8 R60.2 | length 122.4
  Top Layer w0.6: R60.2@9.942,57 15.5,57 27.25,68.75 61.5,68.75 74.25,56 74.25,19.25 79.33,14.17 IC1B.8@83.35,14.17
VOB_BUS3: IC1C.8 R66.2 | length 36.7
  Top Layer w0.6: R66.2@9.917,45 12.5,45 29,61.5 35.25,61.5 37.15,59.6 IC1C.8@37.15,57.75
pads on no net: IC1A.12 IC1B.12 IC1C.12 IC3A.10 IC3B.10 IC3C.10

## Polygon pours and split planes (outlines as drawn)
GND_ISOLIERTB on Layer 2 "NONET_L-01_P-001" (solid, pour order 2): 87.155,28.82 91.975,24 91.975,8.5 97.975,2.5 138.475,2.5 138.475,48.5 87.975,48.5 87.155,47.68
GND_ISOLIERTC on Layer 2 "NONET_L-01_P-001" (solid, pour order 6): 51.82,53.846 47,49.025 31.5,49.025 25.5,43.025 25.5,2.525 71.5,2.525 71.5,53.025 70.68,53.846
GND_ISOLIERTA on Layer 2 "NONET_L-01_P-001" (solid, pour order 4): 87.154,77.82 91.975,73 91.975,57.5 97.975,51.5 138.475,51.5 138.475,97.5 87.975,97.5 87.154,96.68
Shield_LTCA on Layer 1 "NONET_L-01_P-001" (solid, pour order 30): 87.157,77.818 91.978,72.997 91.978,57.497 97.978,51.497 138.478,51.497 138.478,97.497 87.978,97.497 87.157,96.677
+5V_ISOLIERTA on Layer 1 "NONET_L-01_P-001" (solid, pour order 3): 87.154,82.484 87.154,82.856 89.775,85.476 98.524,85.476 115.975,68.026 115.975,52.5 114.975,51.5 97.975,51.5 91.975,57.5 91.975,73 87.157,77.818 87.157,82.397
Shield_LTCC on Layer 1 "NONET_L-01_P-001" (solid, pour order 33): 51.82,53.846 47,49.025 31.5,49.025 25.5,43.025 25.5,2.525 71.5,2.525 71.5,53.025 70.68,53.846
+5V_ISOLIERTC on Layer 1 "NONET_L-01_P-001" (solid, pour order 5): 56.484,53.846 56.856,53.846 59.476,51.225 59.476,42.476 42.026,25.025 26.5,25.025 25.5,26.025 25.5,43.025 31.5,49.025 47,49.025 51.818,53.843 56.397,53.843
Shield_LTCB on Layer 1 "NONET_L-01_P-001" (solid, pour order 32): 87.157,28.818 91.978,23.997 91.978,8.497 97.978,2.497 138.478,2.497 138.478,48.497 87.978,48.497 87.157,47.677
+5V_ISOLIERTB on Layer 1 "NONET_L-01_P-001" (solid, pour order 1): 87.155,33.484 87.155,33.856 89.775,36.476 98.524,36.476 115.975,19.026 115.975,3.5 114.975,2.5 97.975,2.5 91.975,8.5 91.975,24 87.157,28.818 87.157,33.397
GND on Layer 1 "GND_L02_P027" (solid, pour order 27): 1,98 2,99 84,99 86,97 86,3 84,1 74,1 73,2 73,53 71,55 34,55 23,44 23,2 22,1 3,1 1,3
GND on Layer 1 "GND_L02_P043" (solid, pour order 43): -12.5,71.5 -9.25,71.5 -6.5,74.25 1.25,74.25 1.25,25.75 -6.5,25.75 -10,29.25 -12.5,29.25 -12.5,46.75 -8.75,46.75 -8,47.5 -8,49.25 -8.843,50.093 -12.434,50.093
Shield_LTCA on Top Layer "NONET_L-01_P-001" (solid, pour order 14): 87.154,77.82 91.975,73 91.975,57.5 97.975,51.5 138.475,51.5 138.475,97.5 87.975,97.5 87.154,96.68
Shield_LTCC on Top Layer "NONET_L-01_P-001" (solid, pour order 23): 51.818,53.843 46.997,49.022 31.497,49.022 25.497,43.022 25.497,2.522 71.497,2.522 71.497,53.022 70.677,53.843
Shield_LTCB on Top Layer "NONET_L-01_P-001" (solid, pour order 22): 87.155,28.82 91.975,24 91.975,8.5 97.975,2.5 138.475,2.5 138.475,48.5 87.975,48.5 87.155,47.68
GND on Top Layer "GND_L01_P039" (solid, pour order 39): -12.5,71.5 -9.25,71.5 -6.5,74.25 -0.5,74.25 0.5,73.25 0.5,25.75 -6.5,25.75 -10,29.25 -12.5,29.25 -12.5,46.75 -8.75,46.75 -8,47.5 -8,49.25 -8.843,50.093 -12.434,50.093
Shield_Main on Top Layer "SHIELD_MAIN_L01_P035" (solid, pour order 35): 1,98 2,99 84,99 86,97 86,3 84,1 74,1 73,2 73,53 71,55 34,55 23,44 23,2 22,1 3,1 1,3
NetIC3C_36 on Top Layer "NONET_L-01_P-001" (solid, pour order 8): 43.259,37.36 48.199,37.36 48.299,37.459 48.299,38.469 47.116,39.652 45.216,39.652 43.264,37.7
VIN on Top Layer "VIN_L01_P010" (solid, pour order 10): -13.84,69.345 -10.107,69.345 -7.031,69.345 -5.75,70.626 -5.75,72.395 -7.855,72.395 -10.399,69.851 -13.835,69.851
NetIC3A_36 on Top Layer "NONET_L-01_P-001" (solid, pour order 7): 103.64,69.259 103.64,74.199 103.541,74.299 102.531,74.299 101.348,73.116 101.348,71.216 103.3,69.264
NetIC3B_36 on Top Layer "NONET_L-01_P-001" (solid, pour order 0): 103.64,20.259 103.64,25.199 103.541,25.299 102.531,25.299 101.348,24.116 101.348,22.216 103.3,20.264
Shield_LTCA on Bottom Layer "NONET_L-01_P-001" (solid, pour order 15): 87.154,77.82 91.975,73 91.975,57.5 97.975,51.5 138.475,51.5 138.475,97.5 87.975,97.5 87.154,96.68
Shield_LTCC on Bottom Layer "NONET_L-01_P-001" (solid, pour order 21): 51.82,53.846 47,49.025 31.5,49.025 25.5,43.025 25.5,2.525 71.5,2.525 71.5,53.025 70.68,53.846
Shield_LTCB on Bottom Layer "NONET_L-01_P-001" (solid, pour order 20): 87.155,28.82 91.975,24 91.975,8.5 97.975,2.5 138.475,2.5 138.475,48.5 87.975,48.5 87.155,47.68
Shield_Main on Bottom Layer "SHIELD_MAIN_L04_P037" (solid, pour order 37): 1,98 2,99 84,99 86,97 86,3 84,1 74,1 73,2 73,53 71,55 34,55 23,44 23,2 22,1 3,1 1,3
GND on Bottom Layer "GND_L04_P041" (solid, pour order 41): -12.5,71.5 -9.25,71.5 -6.5,74.25 -0.5,74.25 0.5,73.25 0.5,25.75 -6.5,25.75 -10,29.25 -12.5,29.25 -12.5,46.75 -8.75,46.75 -8,47.5 -8,49.25 -8.843,50.093 -12.434,50.093
VIN on Bottom Layer "VIN_L04_P009" (solid, pour order 9): -13.84,69.345 -10.107,69.345 -7.031,69.345 -5.75,70.626 -5.75,72.395 -7.855,72.395 -10.399,69.851 -13.835,69.851

## Silkscreen, mask and mechanical layers (free items; w line width, h text height)
Top Overlay:
  lines w0.254: 73,0 73,100 ; 73,49 141,49 ; 3,40 3,78.5 4,79.5 8.5,79.5 15,79.5 16,78.5 16,40 15,39 4,39 3,40 ; 7.5,84 7.5,97.5 8,98 55,98 55.5,97.5 55.5,84 55,83.5 8,83.5 7.5,84 ; 26,10 70,10 70.5,10.5 70.5,23.5 70,24 26,24 26,10 ; 26,27.025 26,49.5 28,49.5 28,27.025 26,27.025 ; 91.5,3 91.5,5 113.975,5 113.975,3 91.5,3 ; 91.5,52 91.5,54 113.975,54 113.975,52 91.5,52 ; 117,3 131,3 131,47 130.5,47.5 117.5,47.5 117,47 117,3 ; 117,52 131,52 131,96 130.5,96.5 117.5,96.5 117,96 117,52
  text "Filter and  / Wiring" at 117.5,92 h1.25
  text "LTC 2983 / Channel A" at 93.5,90.5 h2
  text "Power Supply" at 41.5,90 h1.52
  text "COM_____" at 133.329,79.997 h1.52 r90
  text "Temperature Measurement Card / MultiSensor 60Ch" at 25.5,68.5 h2.5
  text "Channels_________" at 133.373,53.747 h1.52 r90
  text "Bus Probes" at 6,52.5 h1.52 r90
  text "CJC" at 92.5,52 h1.52
  text "CJC" at 28,44 h1.52 r90
  text "Filter and  / Wiring" at 117.5,43 h1.25
  text "LTC 2983 / Channel B" at 95,41 h2
  text "LTC 2983 / Channel C" at 70,36.5 h2 r90
  text "COM_____" at 133.329,30.997 h1.52 r90
  text "Filter and  / Wiring" at 66,23.5 h1.25 r270
  text "COM_____" at 53.997,7.671 h1.52
  text "Channels_________" at 27.747,7.627 h1.52
  text "Channels_________" at 133.373,4.747 h1.52 r90
  text "CJC" at 92,3 h1.52
  text "Designer: / Robert Zipprich / Niclas Erlemann" at 2.9,2.9 h1.25
Mechanical 1:
  lines w0.254: -9.853,27.775 cw(c-9.853,26.775) -8.853,26.775 ; -9.853,72.225 ccw(c-9.853,73.225) -8.853,73.225 ; -9.64,47.191 ccw(c-9.64,48.391) -9.64,49.591 ; -7.473,23.275 ccw(c-7.473,23.675) -7.073,23.675 ; -7.473,76.725 cw(c-7.473,76.325) -7.073,76.325 ; -7.073,24.275 cw(c-6.073,24.275) -6.073,25.275 ; -7.073,75.725 ccw(c-6.073,75.725) -6.073,74.725 ; 0,2.9 ccw(c2.9,2.9) 2.9,0 ; 0.031,97.1 cw(c2.966,97.066) 3,100

## Dimensions
141.141,0 to 141.141,100 on Mechanical 2
146.143,97.802 to -14.84,72.216 on Mechanical 2
141.141,100 to -14.853,72.225 on Mechanical 2
141.141,100 to 0.031,100 on Mechanical 2

## Text inside footprints (layer, text, board x,y; h text height)
P1A: Top Overlay "1" at 137.508,52.68 h1.25 r90; Top Overlay "2" at 134.968,52.68 h1.25 r90; Top Overlay "29" at 137.508,92.304 h1.25 r90; Top Overlay "30" at 134.968,92.304 h1.25 r90
P1B: Top Overlay "30" at 134.968,43.304 h1.25 r90; Top Overlay "29" at 137.508,43.304 h1.25 r90; Top Overlay "2" at 134.968,3.68 h1.25 r90; Top Overlay "1" at 137.508,3.68 h1.25 r90
P1C: Top Overlay "30" at 66.304,6.032 h1.25; Top Overlay "29" at 66.304,3.492 h1.25; Top Overlay "2" at 26.68,6.032 h1.25; Top Overlay "1" at 26.68,3.492 h1.25